# Altium PCB antenna_board.PcbDoc
Units mil, origin at the board's own origin, x right, y up, seen from the top; angles counter-clockwise.
Board outline 3895 x 2775 mil, 2 copper layers (Top Layer, Bottom Layer); 31 components, 17 nets, 105 pads, 14 vias.
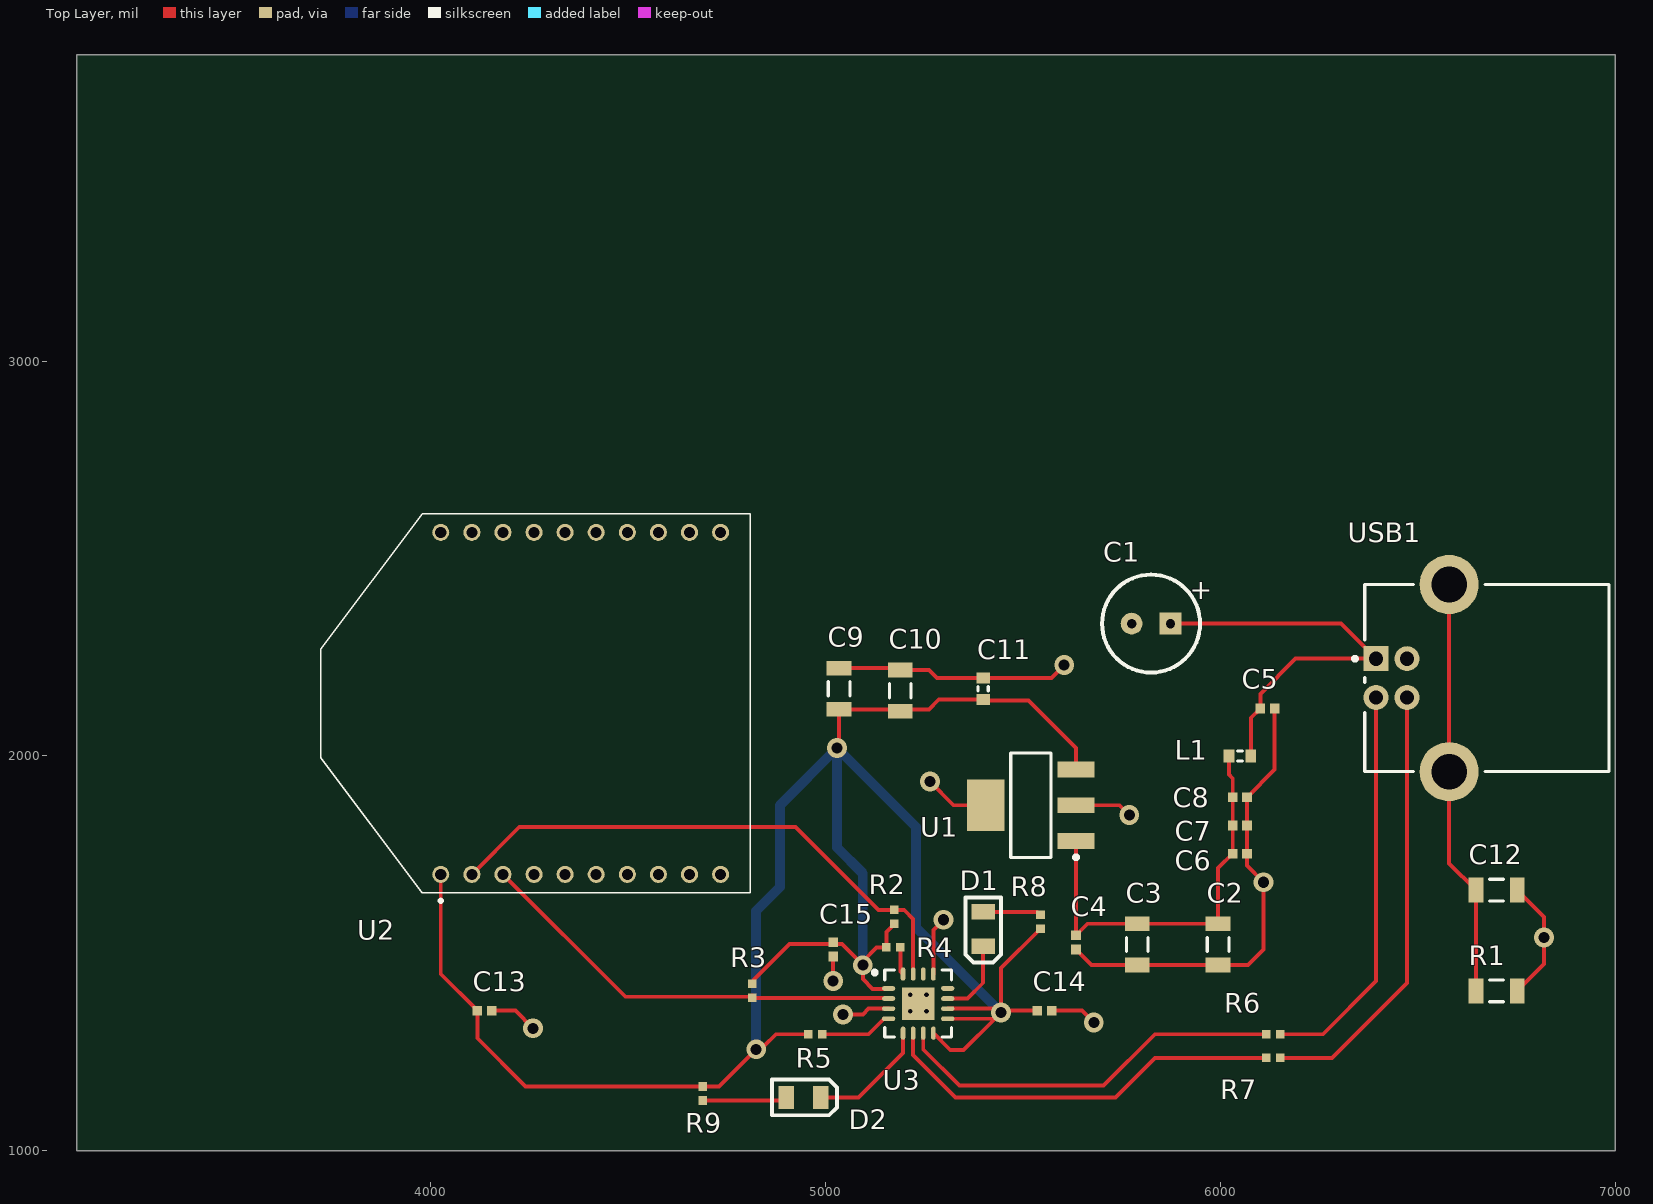
[diagram p0: Top Layer view]
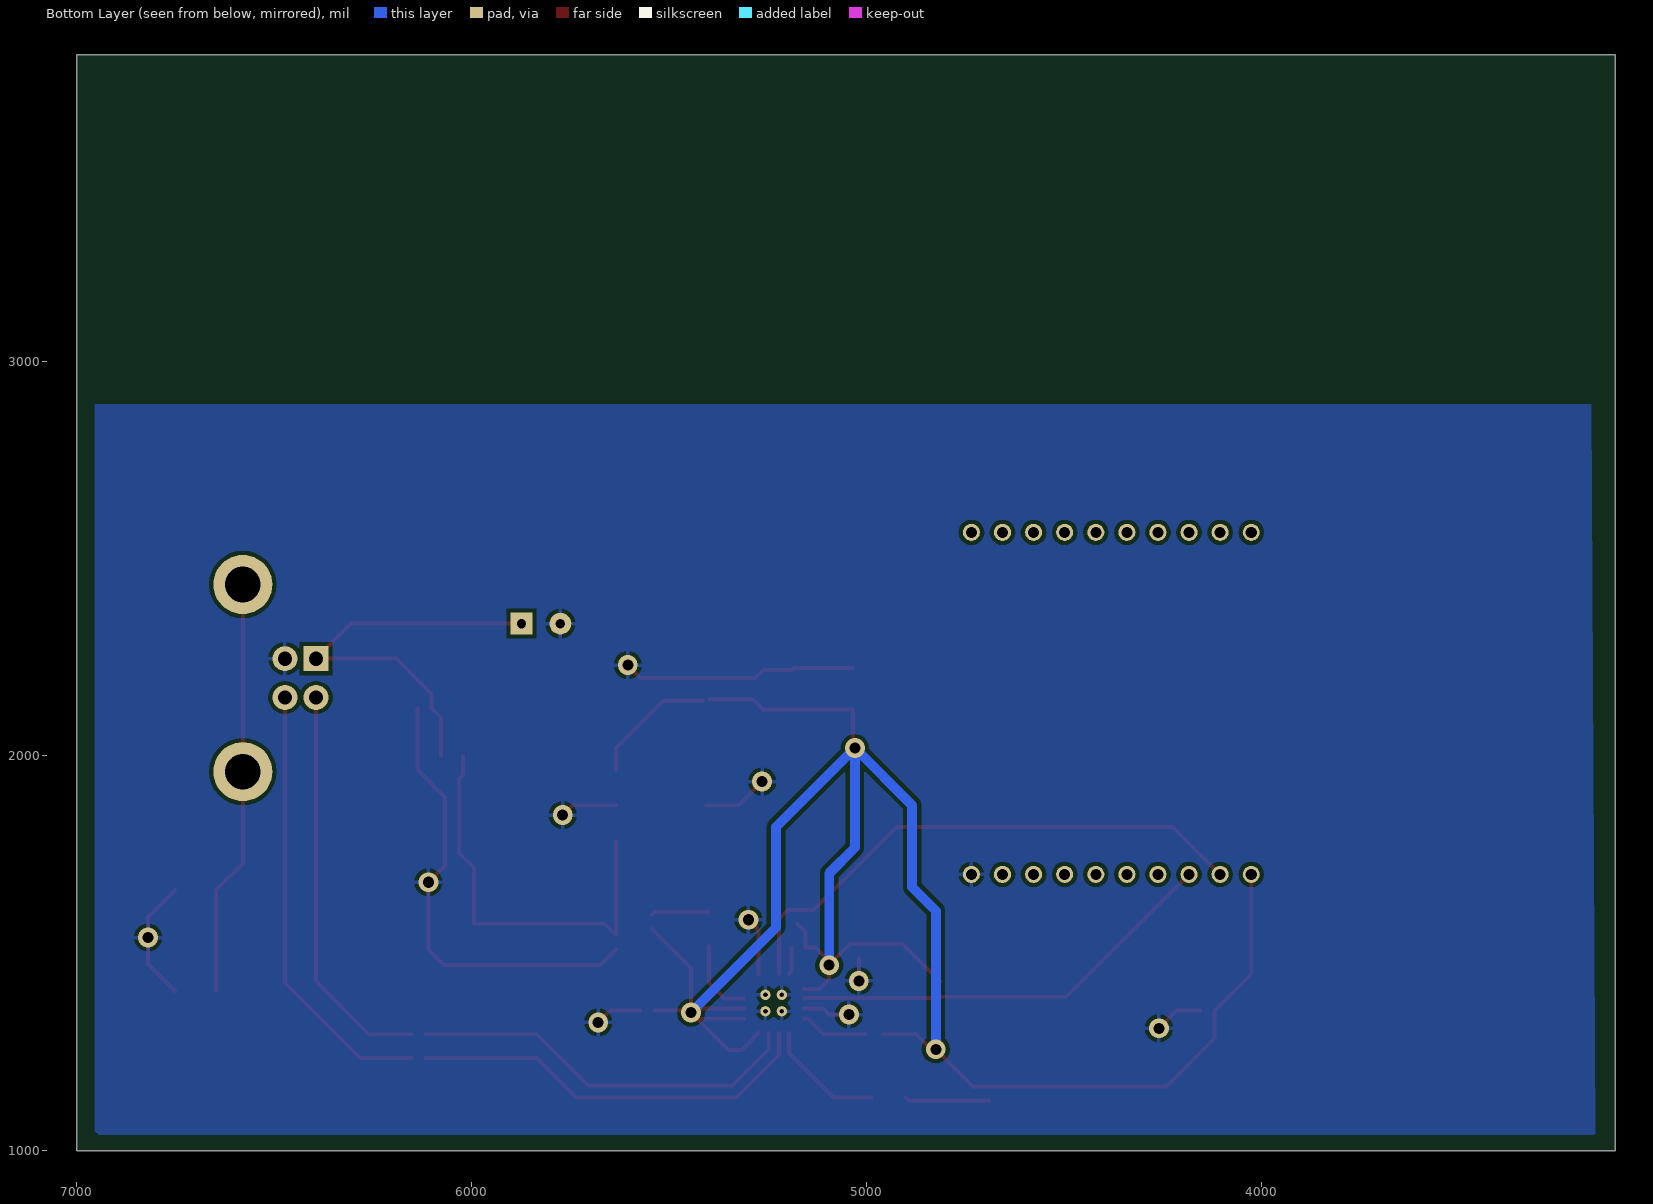
[diagram p1: Bottom Layer view, seen from below]
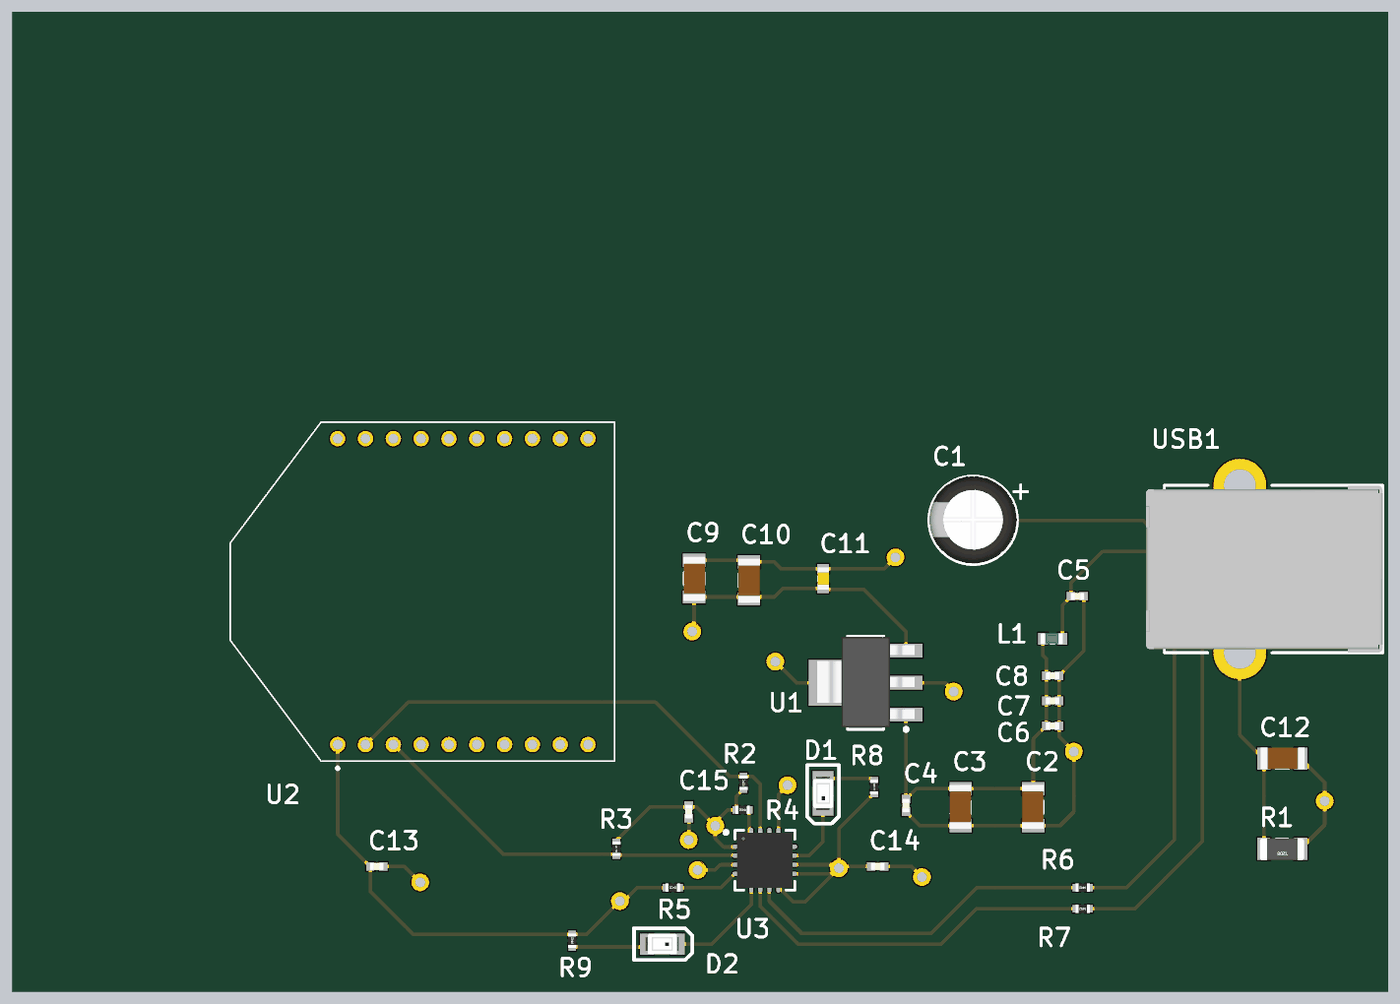
[diagram p2: 3D render of the assembled board from above, using the file's embedded part models]

## Layer stack, top to bottom
Top Solder: solder mask 0.4, Solder Resist, Dk 3.5
Top Layer: signal copper 1.4
Dielectric 1: dielectric 12.6, FR-4, Dk 4.8
Bottom Layer: signal copper 1.4
Bottom Solder: solder mask 0.4, Solder Resist, Dk 3.5

## Board outline
3105,1000 7000,1000 7000,3775 3105,3775

## Design rules (kind name [scope] priority, off if disabled: settings)
Clearance [All] p1: gap=10 ignorepadtopadclearanceinfootprint=FALSE
PolygonConnect [All] p1: connectstyle=Relief reliefconductorwidth=10 reliefentries=4 polygonreliefangle="90 Angle" airgapwidth=10
RoutingVias [All] p1: holewidth=28 width=50 viastyle="Through Hole" minholewidth=28 minwidth=50 maxholewidth=28 maxwidth=50
SolderMaskExpansion [All] p1: expansion=4
Width [All] p1: maxlimit=25 minlimit=10 preferedwidth=10 toplayer_maxwidth=10 minimp=50.000000 maximp=50.000000 favimp=50.000000
30 further rules are at their usual default settings.

## Components (designator, comment, footprint, x,y, rotation, side; value= is the part's Value field where it differs from the comment)
C1 "100uF" CapAlu6.3mmx12.5mm 5825,2335 r0 top
C2 "100uF" CAP_1206 5995,1522.72 r270 top
C3 "100uF" CAP_1206 5790,1522.72 r270 top
C4 "1uF" CAP_0402_M 5635,1527.72 r90 top
C5 "10nF" CAP_0402_M 6120,2120 r180 top
C6 "100nF" CAP_0402_M 6050,1752.56 r180 top
C7 "2.2uF" CAP_0402_M 6050,1823.78 r180 top
C8 "2.2uF" CAP_0402_M 6050,1895 r180 top
C9 "100uF" CAP_1206 5035,2170 r90 top
C10 "100uF" CAP_1206 5190,2165 r90 top
C11 "10uF" CAP_0603 5400,2170 r90 top
C12 "10nF" CAP_1206 6700,1660 r180 top
C13 "100nF" CAP_0402_M 4136.89,1355 r180 top
C14 "100nF" CAP_0402_M 5555,1355 r180 top
C15 "100nF" CAP_0402_M 5020,1510 r90 top
D1 "Led Red" "TOPLED 0805" 5400,1561.69 r270 top
D2 "Led Red" "TOPLED 0805" 4945,1135 r0 top
L1 "200R" IND_0603 6050,2000 r180 top
R1 "1M" RES_1206 6700,1405 r180 top
R2 "10k" RES_0402_M 5175,1592.28 r270 top
R3 "10k" RES_0402_M 4815,1405 r90 top
R4 "10k" RES_0402_M 5172.28,1515 r180 top
R5 "10k" RES_0402_M 4975,1295 r180 top
R6 "27" RES_0402_M 6135,1295 r180 top
R7 "27" RES_0402_M 6135,1235 r180 top
R8 "120" RES_0402_M 5545,1580 r270 top
R9 "120" RES_0402_M 4690,1145 r90 top
U1 "MCP1825S-3302E/DB" SOT230P700X180-4N 5520.83,1875 r180 top
U2 "XB3-24Z8ST" XB324Z8ST 4026.26,1700 r90 top
U3 "FT230XQ" QFN65P400X400X80_HS-17N 5235.32,1372.67 r0 top
USB1 "USB type-B jack" USB2.5-2H4E 6433.94,2197.01 r0 top

## Footprints (in the part's own frame and the unit in brackets; to place one, negate y for a bottom-side part, rotate by r counter-clockwise, add the part's x,y. Pads: shape width x height; smd on the part's side, far side on the other; paste and mask are expansions set on the pad)
CAP_0402_M [mm] "Chip Capacitor, 2-Leads, Body 1.00x0.50mm, IPC Medium Density"
  rect 0.62x0.62 smd: 1(-0.46,0) 2(0.46,0)
  body extent -0.5,-0.26 0.5,0.27, height 0.36
CAP_0603 [mm] "Chip Capacitor, 2-Leads, Body 1,6x0,8mm, IPC High Density"
  rect 0.7x0.85 smd: 1(-0.7,0) 2(0.7,0)
  silkscreen extent -0.15,-0.33 0.15,0.33, body extent -0.8,-0.42 0.8,0.38, height 0.7
CAP_1206 [mm] "Chip Capacitor, 2-Leads, Body 3,1x1,6mm, IPC High Density"
  rect 0.95x1.6 smd: 1(-1.325,0) 2(1.325,0)
  silkscreen extent -0.45,-0.7 0.45,0.7, body extent -1.63,-0.82 1.57,0.78, height 1.6
CapAlu6.3mmx12.5mm [mm] "Capacitor Aluminum 6.3mm OD"
  rect 1.4x1.4 hole 0.6: 1(1.25,0)
  round 1.4 hole 0.6: 2(-1.25,0)
  silkscreen extent -3.15,-3.15 3.15,3.15, body extent -3.15,-3.11 3.15,3.19, height 12
IND_0603 [mm]
  rect 0.7x0.85 smd: 1(-0.7,0) 2(0.7,0)
  silkscreen extent -0.15,-0.33 0.15,0.33, body extent -0.74,-0.4 0.86,0.4, height 0.95
QFN65P400X400X80_HS-17N [mm] "QFN, 16-Leads, Body 4.00x4.00mm, Pitch 0.65mm, Thermal Pad 2.08x2.08mm, IPC Medium Density"
  oval 0.85x0.3 smd: 1(-1.9,0.975) 2(-1.9,0.325) 3(-1.9,-0.325) 4(-1.9,-0.975) 9(1.9,-0.975) 10(1.9,-0.325) 11(1.9,0.325) 12(1.9,0.975)
  oval 0.3x0.85 smd: 5(-0.975,-1.9) 6(-0.325,-1.9) 7(0.325,-1.9) 8(0.975,-1.9) 13(0.975,1.9) 14(0.325,1.9) 15(-0.325,1.9) 16(-0.975,1.9)
  round 0.66 hole 0.305: 17(-0.516,-0.493) 17(-0.516,0.567) 17(0.538,-0.493) 17(0.538,0.567)
  rect 2.08x2.08 smd: 17(0,0)
  silkscreen extent -2.92,-2.15 2.15,2.15, body extent -2,-2 2,2, height 0.92
RES_0402_M [mm] "Chip Resistor, 2-Leads, Body 1.00x0.50mm, IPC Medium Density"
  rect 0.55x0.55 smd: 1(-0.45,0) 2(0.45,0)
  body extent -0.52,-0.3 0.52,0.3, height 0.34
RES_1206 [mm] "Chip Resistor 2-Leads, Body 3,1x1,6mm, IPC High Density"
  rect 0.95x1.6 smd: 1(-1.325,0) 2(1.325,0)
  silkscreen extent -0.45,-0.7 0.45,0.7, body extent -1.59,-0.76 1.61,0.84, height 1
SOT230P700X180-4N [mm] "SOT223, 4-Leads, Body 6,7x7,3mm (max), Pitch 2,30mm, IPC Medium Density"
  rect 2.4x1 smd: 1(-2.9,2.3) 2(-2.9,0) 3(-2.9,-2.3)
  rect 2.4x3.3 smd: 4(2.9,0)
  silkscreen extent -3.03,-3.35 1.3,3.47, body extent -3.5,-3.3 3.5,3.2, height 1.69
"TOPLED 0805" [mm]
  rect 1x1.5 smd: 1(-1.1,0) 2(1.1,0)
  silkscreen extent -2.03,-1.14 2.16,1.14, body extent -1.2,-0.74 1.2,0.76, height 1.45
USB2.5-2H4E [mm] "Connector; USB1.1, Type B, Thru-Hole; 4 Position; Right Angle"
  rect 1.6x1.6 hole 0.92: 1(-1,1.25)
  round 1.6 hole 0.92: 2(-1,-1.25) 3(1,-1.25) 4(1,1.25)
  round 3.8 hole 2.3: 5(3.71,6.02) 6(3.71,-6.02)
  silkscreen extent -2.47,-6.02 13.99,6.02, body extent -3.03,-6 13.97,6, height 10.9
XB324Z8ST [mm]
  round 1.1 hole 0.71: 1(0,0) 2(0,-2) 3(0,-4) 4(0,-6) 5(0,-8) 6(0,-10) 7(0,-12) 8(0,-14) 9(0,-16) 10(0,-18) 11(22,-18) 12(22,-16) 13(22,-14) 14(22,-12) 15(22,-10) 16(22,-8) 17(22,-6) 18(22,-4) 19(22,-2) 20(22,0)
  silkscreen extent -1.8,-19.91 23.19,7.72

## Part data
C1: library part 100uF_35v_6.3x12.5, "Capacitor 35v 100uF 6.3mm", Capacitance=100µF, ESR (Equivalent Series Resistance)=-, Lifetime @ Temp.="5000 Hrs @ 105°C", Manufacturer=Nichicon, Manufacturer Part Number=UHV1V101MED, Operating Temperature="-40°C ~ 105°C", Package / Case="Radial, Can", Ripple Current="220mA @ 120Hz", Supplier Part Number 1=493-13394-ND, Tolerance=±20%, Voltage Rating=35V, Applications="General Purpose", Category=Capacitors, ComponentLink1Description=http://nichicon-us.com/english/products/pdfs/e-uhv.pdf, ComponentLink1URL=http://nichicon-us.com/english/products/pdfs/e-uhv.pdf, Height - Seated (Max)="0.492\" (12.50mm)", Impedance="100 mOhm", Lead Spacing="0.098\" (2.50mm)", Mounting Type="Through Hole", Packaging=Bulk, Polarization=Polar, Pricing 1="1=0.46, 10=0.32, 25=0.262, 50=0.224, 100=0.1919, 250=0.15992, 500=0.14394, 1000=0.12155, 2500=0.11515 (CAD)", RoHS="RoHS Compliant", Size / Dimension="0.248\" Dia (6.30mm)", Stock 1=5561, Supplier 1=Digi-Key, Surface Mount Land Size=-
C2 C3 C9 C10: library part 100uF_6.3v_1206_X5R, "CAP CER 100UF 6.3V X5R 1206", Capacitance=100µF, Manufacturer="Murata Electronics North America", Manufacturer Part Number=GRM31CR60J107ME39L, Operating Temperature="-55°C ~ 85°C", Package / Case="1206 (3216 Metric)", Ratings=-, Supplier Part Number 1=490-4539-1-ND, Temperature Coefficient=X5R, Tolerance=±20%, Voltage - Rated=6.3V, Applications="General Purpose", Category=Capacitors, ComponentLink1Description=http://www.murata.com/~/media/webrenewal/support/library/catalog/products/capacitor/mlcc/c02e.pdf, ComponentLink1URL=http://www.murata.com/~/media/webrenewal/support/library/catalog/products/capacitor/mlcc/c02e.pdf, Features=-, Height - Seated (Max)=-, Lead Spacing=-, Lead Style=-, Mounting Type="Surface Mount, MLCC", Packaging="Cut Tape (CT)", Pricing 1="1=1.23, 10=1.048, 50=0.771, 100=0.6128, 250=0.51396, 500=0.46456, 1000=0.42502 (CAD)", RoHS="RoHS Compliant", Size / Dimension="0.126\" L x 0.063\" W (3.20mm x 1.60mm)", Stock 1=450179, Supplier 1=Digi-Key, Thickness (Max)="0.071\" (1.80mm)"
C4: library part 1uF_25V_0402, "CAP CER 1UF 25V 10% X5R 0402", Capacitance=1µF, Manufacturer="TDK Corporation", Manufacturer Part Number=C1005X5R1E105K050BC, Operating Temperature="-55°C ~ 85°C", Package / Case="0402 (1005 Metric)", Ratings=-, Supplier Part Number 1=445-9066-1-ND, Temperature Coefficient=X5R, Tolerance=±10%, Voltage - Rated=25V, Applications="General Purpose", Category=Capacitors, ComponentLink1Description=http://product.tdk.com/en/catalog/datasheets/mlcc_commercial_general_en.pdf, ComponentLink1URL=http://product.tdk.com/en/catalog/datasheets/mlcc_commercial_general_en.pdf, Features=-, Height - Seated (Max)=-, Lead Spacing=-, Lead Style=-, Mounting Type="Surface Mount, MLCC", Packaging="Cut Tape (CT)", Pricing 1="1=0.27, 10=0.185, 100=0.0878, 250=0.074, 500=0.06196, 1000=0.05087, 5000=0.04301 (CAD)", RoHS="RoHS Compliant", Size / Dimension="0.039\" L x 0.020\" W (1.00mm x 0.50mm)", Stock 1=310467, Supplier 1=Digi-Key, Thickness (Max)="0.022\" (0.55mm)"
C5: library part 10nF_50V_0402, "CAP CER 10000PF 50V 10% X7R 0402", Capacitance=10000pF, Manufacturer=Kemet, Manufacturer Part Number=C0402C103K5RACTU, Operating Temperature="-55°C ~ 125°C", Package / Case="0402 (1005 Metric)", Ratings=-, Supplier Part Number 1=399-3066-1-ND, Temperature Coefficient=X7R, Tolerance=±10%, Voltage - Rated=50V, Applications="General Purpose", Category=Capacitors, ComponentLink1Description=http://www.kemet.com/docfinder?Partnumber=C0402C103K5RACTU, ComponentLink1URL=http://www.kemet.com/docfinder?Partnumber=C0402C103K5RACTU, Features=-, Height - Seated (Max)=-, Lead Spacing=-, Lead Style=-, Mounting Type="Surface Mount, MLCC", Packaging="Cut Tape (CT)", Pricing 1="1=0.14, 10=0.037, 25=0.026, 50=0.0198, 100=0.0166, 250=0.01364, 1000=0.00893, 2500=0.00804, 5000=0.00744 (CAD)", RoHS="RoHS Compliant", Size / Dimension="0.039\" L x 0.020\" W (1.00mm x 0.50mm)", Stock 1=3556921, Supplier 1=Digi-Key, Thickness (Max)="0.022\" (0.55mm)"
C6 C13 C14 C15: library part 100nF_50V_0402, "CAP CER 100NF 50V 20% X5R 0402", Capacitance=0.1µF, Manufacturer="TDK Corporation", Manufacturer Part Number=C1005X5R1H104M050BB, Operating Temperature="-55°C ~ 85°C", Package / Case="0402 (1005 Metric)", Ratings=-, Supplier Part Number 1=445-5943-1-ND, Temperature Coefficient=X5R, Tolerance=±20%, Voltage - Rated=50V, Applications="General Purpose", Category=Capacitors, ComponentLink1Description=http://product.tdk.com/en/catalog/datasheets/mlcc_commercial_general_en.pdf, ComponentLink1URL=http://product.tdk.com/en/catalog/datasheets/mlcc_commercial_general_en.pdf, Features=-, Height - Seated (Max)=-, Lead Spacing=-, Lead Style=-, Mounting Type="Surface Mount, MLCC", Packaging="Cut Tape (CT)", Pricing 1="1=0.18, 10=0.122, 100=0.0579, 250=0.04872, 500=0.0408, 1000=0.03348, 5000=0.02831 (CAD)", RoHS="RoHS Compliant", Size / Dimension="0.039\" L x 0.020\" W (1.00mm x 0.50mm)", Stock 1=218263, Supplier 1=Digi-Key, Thickness (Max)="0.022\" (0.55mm)"
C7 C8: library part 2.2uF_10V_0402, "CAP CER 2.2UF 10V 20% X5R 0402", Capacitance=2.2µF, Manufacturer="Taiyo Yuden", Manufacturer Part Number=LMK105BJ225MV-F, Operating Temperature="-55°C ~ 85°C", Package / Case="0402 (1005 Metric)", Ratings=-, Supplier Part Number 1=587-3153-1-ND, Temperature Coefficient=X5R, Tolerance=±20%, Voltage - Rated=10V, Applications="General Purpose", Category=Capacitors, ComponentLink1Description=http://www.yuden.co.jp/ut/product/category/capacitor/LMK105BJ225MV-F.pdf, ComponentLink1URL=http://www.yuden.co.jp/ut/product/category/capacitor/LMK105BJ225MV-F.pdf, Features=-, Height - Seated (Max)=-, Lead Spacing=-, Lead Style=-, Mounting Type="Surface Mount, MLCC", Packaging="Cut Tape (CT)", Pricing 1="1=0.26, 10=0.173, 50=0.105, 100=0.0881, 250=0.07132, 500=0.0629, 1000=0.05348, 2500=0.04928, 5000=0.04509 (CAD)", RoHS="RoHS Compliant", Size / Dimension="0.039\" L x 0.020\" W (1.00mm x 0.50mm)", Stock 1=258065, Supplier 1=Digi-Key, Thickness (Max)="0.022\" (0.55mm)"
C11: library part 10uF_10V_0603, "CAP CER 10UF 10V 20% X5R 0603", Capacitance=10µF, Manufacturer="Taiyo Yuden", Manufacturer Part Number=LMK107BBJ106MAHT, Operating Temperature="-55°C ~ 85°C", Package / Case="0603 (1608 Metric)", Ratings=AEC-Q200, Supplier Part Number 1=587-3412-1-ND, Temperature Coefficient=X5R, Tolerance=±20%, Voltage - Rated=10V, Applications=Automotive, Category=Capacitors, ComponentLink1Description=http://www.yuden.co.jp/productdata/catalog/en/mlcc01_hq_e.pdf, ComponentLink1URL=http://www.yuden.co.jp/productdata/catalog/en/mlcc01_hq_e.pdf, Features=-, Height - Seated (Max)=-, Lead Spacing=-, Lead Style=-, Mounting Type="Surface Mount, MLCC", Packaging="Cut Tape (CT)", Pricing 1="1=0.5, 10=0.437, 50=0.266, 100=0.2189, 250=0.17516, 500=0.15952, 1000=0.14107 (CAD)", RoHS="RoHS Compliant", Size / Dimension="0.063\" L x 0.031\" W (1.60mm x 0.80mm)", Stock 1=90195, Supplier 1=Digi-Key, Thickness (Max)="0.035\" (0.90mm)"
C12: library part 10nF_500V_1206, "CAP CER 10000PF 500V X7R 1206", Capacitance=10000pF, Manufacturer="Samsung Electro-Mechanics America, Inc", Manufacturer Part Number=CL31B103KGFNNNE, Operating Temperature="-55°C ~ 125°C", Package / Case="1206 (3216 Metric)", Ratings=-, Supplier Part Number 1=1276-3076-1-ND, Temperature Coefficient=X7R, Tolerance=±10%, Voltage - Rated=500V, Applications="General Purpose", Category=Capacitors, ComponentLink1Description=http://www.samsungsem.com/kr/front/downloadcms.do?path=/kr/support/product-search/mlcc/__icsFiles/afieldfile/2014/11/05&fileName=S_CL31B103KGFNNNE.pdf, ComponentLink1URL=http://www.samsungsem.com/kr/front/downloadcms.do?path=/kr/support/product-search/mlcc/__icsFiles/afieldfile/2014/11/05&fileName=S_CL31B103KGFNNNE.pdf, Features=-, Height - Seated (Max)=-, Lead Spacing=-, Lead Style=-, Mounting Type="Surface Mount, MLCC", Packaging="Cut Tape (CT)", Pricing 1="1=0.34, 10=0.28, 25=0.192, 100=0.1398, 500=0.09266, 1000=0.08216 (CAD)", RoHS="RoHS Compliant", Size / Dimension="0.126\" L x 0.063\" W (3.20mm x 1.60mm)", Stock 1=9075, Supplier 1=Digi-Key, Thickness (Max)="0.055\" (1.40mm)"
D1 D2: library part "TOPLED 0803", "LED TOPLED 630NM SUP RED CLR SMD", Color=Red, Current - Test=2mA, Luminous Flux @ Current - Test="25 mlm", Manufacturer="OSRAM Opto Semiconductors Inc", Manufacturer Part Number="LS M67K-H2L1-1-Z", Millicandela Rating=8.78mcd, Package / Case="2-SMD, J-Lead", Supplier Part Number 1=475-2510-1-ND, Voltage - Forward (Vf) (Typ)=1.8V, Category=Optoelectronics, ComponentLink1Description=http://media.digikey.com/pdf/Data%20Sheets/Osram%20PDFs/LS,LO,LY_M67K.pdf, ComponentLink1URL=http://media.digikey.com/pdf/Data%20Sheets/Osram%20PDFs/LS,LO,LY_M67K.pdf, Height=1.30mm, Lens Style/Size="Rectangle with Flat Top, 1.5mm x 1mm", Lens Type=Clear, Mounting Type="Surface Mount", Packaging="Cut Tape (CT)", Pricing 1="1=0.19, 10=0.162, 100=0.1295, 250=0.11328, 500=0.10354 (CAD)", RoHS="RoHS Compliant", Size / Dimension="2.20mm L x 1.40mm W", Stock 1=23262, Supplier 1=Digi-Key, Viewing Angle=120°, Wavelength - Dominant=630nm, Wavelength - Peak=643nm
L1: library part "Ferrite_200 ohms_2A", "FILTER CHIP 220 OHM 2A 0603", Current Rating=2A, DC Resistance (DCR)="50 mOhm Max", Impedance @ Frequency="220 Ohm @ 100MHz", Manufacturer="Murata Electronics North America", Manufacturer Part Number=BLM18EG221SN1D, Package / Case="0603 (1608 Metric)", Supplier Part Number 1=490-3992-1-ND, Category=Filters, ComponentLink1Description=http://search.murata.co.jp/Ceramy/image/img/PDF/ENG/L0110S0101BLM18E.pdf, ComponentLink1URL=http://search.murata.co.jp/Ceramy/image/img/PDF/ENG/L0110S0101BLM18E.pdf, Filter Type="Differential Mode - Single", Height (Max)="0.037\" (0.95mm)", Mounting Type="Surface Mount", Packaging="Cut Tape (CT)", Pricing 1="1=0.33, 10=0.254, 50=0.1814, 100=0.1632, 250=0.13784, 500=0.12332, 1000=0.10519 (CAD)", RoHS="RoHS Compliant", Size / Dimension="0.063\" L x 0.031\" W (1.60mm x 0.80mm)", Stock 1=382631, Supplier 1=Digi-Key
R1: library part 1M_5%_1206, "RES SMD 1M OHM 5% 1/4W 1206", Manufacturer="Panasonic Electronic Components", Manufacturer Part Number=ERJ-8GEYJ105V, Operating Temperature="-55°C ~ 155°C", Package / Case="1206 (3216 Metric)", Power (Watts)="0.25W, 1/4W", Supplier Device Package=1206, Supplier Part Number 1=P1.0MECT-ND, Temperature Coefficient=±200ppm/°C, Tolerance=±5%, Category=Resistors, ComponentLink1Description=http://industrial.panasonic.com/www-cgi/jvcr13pz.cgi?E+PZ+3+AOA0001+ERJ8GEYJ105V+7+WW, ComponentLink1URL=http://industrial.panasonic.com/www-cgi/jvcr13pz.cgi?E+PZ+3+AOA0001+ERJ8GEYJ105V+7+WW, Composition="Thick Film", Features="Automotive AEC-Q200", Height="0.028\" (0.70mm)", Number of Terminations=2, Packaging="Cut Tape (CT)", Pricing 1="1=0.14, 50=0.038, 100=0.029, 250=0.02152, 500=0.01588, 1000=0.01059, 2500=0.00894 (CAD)", Resistance (Ohms)=1M, RoHS="RoHS Compliant", Size / Dimension="0.126\" L x 0.063\" W (3.20mm x 1.60mm)", Stock 1=165352, Supplier 1=Digi-Key
R2 R3 R4 R5: library part 10k_1%_0402, "RES SMD 10K OHM 1% 1/10W 0402", Manufacturer="Panasonic Electronic Components", Manufacturer Part Number=ERJ-2RKF1002X, Operating Temperature="-55°C ~ 155°C", Package / Case="0402 (1005 Metric)", Power (Watts)="0.1W, 1/10W", Supplier Device Package=0402, Supplier Part Number 1=P10.0KLCT-ND, Temperature Coefficient=±100ppm/°C, Tolerance=±1%, Category=Resistors, ComponentLink1Description=http://industrial.panasonic.com/www-cgi/jvcr13pz.cgi?E+PZ+3+AOA0002+ERJ2RKF1002X+7+WW, ComponentLink1URL=http://industrial.panasonic.com/www-cgi/jvcr13pz.cgi?E+PZ+3+AOA0002+ERJ2RKF1002X+7+WW, Composition="Thick Film", Features="Automotive AEC-Q200", Height="0.016\" (0.40mm)", Number of Terminations=2, Packaging="Cut Tape (CT)", Pricing 1="1=0.14, 50=0.0282, 100=0.0215, 250=0.01592, 500=0.01176, 1000=0.00784, 5000=0.00551 (CAD)", Resistance (Ohms)=10k, RoHS="RoHS Compliant", Size / Dimension="0.039\" L x 0.020\" W (1.00mm x 0.50mm)", Stock 1=5818216, Supplier 1=Digi-Key
R6 R7: library part 27_1%_0402, "RES SMD 27 OHM 1% 1/10W 0402", Manufacturer="Panasonic Electronic Components", Manufacturer Part Number=ERJ-2RKF27R0X, Operating Temperature="-55°C ~ 155°C", Package / Case="0402 (1005 Metric)", Power (Watts)="0.1W, 1/10W", Supplier Device Package=0402, Supplier Part Number 1=P27.0LCT-ND, Temperature Coefficient=±100ppm/°C, Tolerance=±1%, Category=Resistors, ComponentLink1Description=http://industrial.panasonic.com/www-cgi/jvcr13pz.cgi?E+PZ+3+AOA0002+ERJ2RKF27R0X+7+WW, ComponentLink1URL=http://industrial.panasonic.com/www-cgi/jvcr13pz.cgi?E+PZ+3+AOA0002+ERJ2RKF27R0X+7+WW, Composition="Thick Film", Features="Automotive AEC-Q200", Height="0.016\" (0.40mm)", Number of Terminations=2, Packaging="Cut Tape (CT)", Pricing 1="1=0.16, 50=0.0234, 100=0.0171, 250=0.01308, 500=0.01048, 1000=0.00771, 5000=0.00553 (CAD)", Resistance (Ohms)=27, RoHS="RoHS Compliant", Size / Dimension="0.039\" L x 0.020\" W (1.00mm x 0.50mm)", Stock 1=490131, Supplier 1=Digi-Key
R8 R9: library part 120_1%_0402, "RES SMD 120 OHM 1% 1/10W 0402", Manufacturer="Panasonic Electronic Components", Manufacturer Part Number=ERJ-2RKF1200X, Operating Temperature="-55°C ~ 155°C", Package / Case="0402 (1005 Metric)", Power (Watts)="0.1W, 1/10W", Supplier Device Package=0402, Supplier Part Number 1=P120LCT-ND, Temperature Coefficient=±100ppm/°C, Tolerance=±1%, Category=Resistors, ComponentLink1Description=http://industrial.panasonic.com/www-cgi/jvcr13pz.cgi?E+PZ+3+AOA0002+ERJ2RKF1200X+7+WW, ComponentLink1URL=http://industrial.panasonic.com/www-cgi/jvcr13pz.cgi?E+PZ+3+AOA0002+ERJ2RKF1200X+7+WW, Composition="Thick Film", Features="Automotive AEC-Q200", Height="0.016\" (0.40mm)", Number of Terminations=2, Packaging="Cut Tape (CT)", Pricing 1="1=0.14, 50=0.0282, 100=0.0215, 250=0.01592, 500=0.01176, 1000=0.00784, 5000=0.00551 (CAD)", Resistance (Ohms)=120, RoHS="RoHS Compliant", Size / Dimension="0.039\" L x 0.020\" W (1.00mm x 0.50mm)", Stock 1=184236, Supplier 1=Digi-Key
U1: "500 mA, Low Voltage, Low Quiescent Current LDO Regulator", Current - Limit (Min)=-, Current - Output=500mA, Manufacturer="Microchip Technology", Operating Temperature="-40°C ~ 125°C", Package / Case="TO-261-4, TO-261AA", Supplier Device Package=SOT-223-3, Supplier Part Number 1=MCP1825S-3302E/DB-ND, Voltage - Dropout (Typical)="0.21V @ 500mA", Voltage - Input="Up to 6V", Voltage - Output=3.3V, Category="Integrated Circuits (ICs)", ComponentLink1Description=http://www.microchip.com/mymicrochip/filehandler.aspx?ddocname=en531698, ComponentLink1URL=http://www.microchip.com/mymicrochip/filehandler.aspx?ddocname=en531698, Manufacturer Part Number=MCP1825S-3302E/DB, Mounting Type="Surface Mount", Number of Regulators=1, Packaging=Tube, Pricing 1="1=0.61, 10=0.51, 25=0.43, 100=0.39 (USD)", Regulator Topology="Positive Fixed", RoHS="RoHS Compliant", Stock 1=5172, Supplier 1=Digi-Key
U2: "Integrated Circuit", Manufacturer_Name="Digi International", Mouser2 Part Number=888-XB3-24Z8ST, Datasheet Link=https://componentsearchengine.com//XB3-24Z8ST.pdf, Height=5mm, Manufacturer_Part_Number=XB3-24Z8ST, Mouser2 Price/Stock=https://www.mouser.com/Search/Refine.aspx?Keyword=888-XB3-24Z8ST
U3: library part FT230XQ-R, "IC USB SERIAL BASIC UART 16QFN", Current - Supply=8mA, Manufacturer="FTDI, Future Technology Devices International Ltd", Operating Temperature="-40°C ~ 85°C", Package / Case="16-WQFN Exposed Pad", Supplier Device Package="16-QFN (4x4)", Supplier Part Number 1=768-1130-1-ND, Voltage - Supply="3.3 V ~ 5 V", Category="Integrated Circuits (ICs)", ComponentLink1Description=http://www.ftdichip.com/Support/Documents/DataSheets/ICs/DS_FT230X.pdf, ComponentLink1URL=http://www.ftdichip.com/Support/Documents/DataSheets/ICs/DS_FT230X.pdf, Function="Bridge, USB to UART", Interface=UART, Manufacturer Part Number=FT230XQ-R, Packaging="Cut Tape (CT)", Pricing 1="1=2.64, 25=2.5508, 100=2.4601, 250=2.21412, 500=1.994, 1000=1.89042, 2500=1.86128 (CAD)", Protocol=USB, RoHS="RoHS Compliant", Standards="USB 2.0", Stock 1=7567, Supplier 1=Digi-Key
USB1: library part "MOLEX 0670688010", Supplier Part Number 1=WM4064-ND, Supplier 1=Digi-Key

## Via types
v1: diameter 50, hole 28, Top Layer to Bottom Layer, 14 vias

## Nets (pads, with @x,y where several pads share a name; then routed paths per layer and width w, separated by ;. In a path a pad name is that pad's centre, name@x,y a point inside that pad or via, vN(x,y) a via of type N, cw(c..) or ccw(c..) an arc to the next point about the centre after c; other vN are vias at no path point)
+3.3V: C9.1 C10.1 C11.1 C13.2 C14.2 C15.2 R2.2 R3.2 R4.2 R5.2 R8.2 R9.2 U1.3 U2.1 U3.1 U3.8 U3.9 U3.10 | length 5878.7
  Top Layer w10: U2.1 4026.26,1447.52 C13.2 4118.78,1285 4241.06,1162.72 R9.2 4730.83,1162.72 v1(4825,1256.89) ; R3.2@4815,1428.77 4909.34,1523.11 5020,1523.11 5041.89,1523.11 v1(5095,1470) ; v1@4845,1265 4875,1295 R5.2 ; v1(5030,2020) 5035,2025 C9.1 5262.83,2117.83 5287.44,2142.44 C11.1 ; U3.1 5159.46,1410 5120,1410 5095,1435 v1(5095,1470) ; R2.2 5154.57,1554.13 R4.2 5130,1515 5095,1480 v1(5095,1470) ; U3.8 5316.57,1255 5350,1255 v1@5429.28,1334.28 ; U3.9 v1@5429.28,1334.28 ; U3.10 5435.13,1359.87 v1(5445,1350) ; C11.1@5415,2140 5515,2140 5635,2020 U1.3 ; C14.2 5450,1355 v1(5445,1350) ; R8.2 5445,1462.28 v1(5445,1350) ; v1@5429.28,1334.28 v1(5445,1350)
  Bottom Layer w25: v1(4825,1256.89) 4825,1607.65 4885,1667.65 4885,1875 v1(5030,2020) ; v1(5095,1470) 5095,1702.65 5030,1767.65 v1(5030,2020) ; v1(5445,1350) 5229.7,1565.3 5229.7,1820.3 v1(5030,2020)
+5V: C2.1 C3.1 C4.2 C6.2 C7.2 C8.2 L1.2 U1.1 | length 1055
  Top Layer w10: U1.1 C4.2 5664.06,1574.88 C3.1 C2.1 5995,1715.67 C6.2 C7.2 C8.2 6031.89,1943.11 6022.44,1952.56 L1.2
DM: R6.1 USB1.2 | length 1015.8
  Top Layer w10: R6.1 6260,1295 6394.57,1429.57 USB1.2
DP: R7.1 USB1.3 | length 1122.1
  Top Layer w10: R7.1 6283.31,1235 6473.31,1425 USB1.3
GND: C1.2 C2.2 C3.2 C4.1 C5.1 C6.1 C7.1 C8.1 C9.2 C10.2 C11.2 C12.1 C13.1 C14.1 C15.1 R1.1 U1.2 U1.4 U2.10 U3.3 U3.13 U3.17 USB1.4 | length 2946.2
  Top Layer w10: C13.1 4215,1355 v1(4260,1310) ; v1(5020,1430) C15.1@5020,1486.89 ; C9.2 5185,2222.17 C10.2 5262.83,2217.17 5282.44,2197.56 C11.2 5572.56,2197.56 v1(5605,2230) ; v1(5045,1345) 5095,1345 5109.87,1359.87 U3.3 ; v1(5265,1935) 5325,1875 U1.4 ; U3.13 5273.71,1559.13 v1(5299.58,1585) ; C14.1 5650,1355 v1(5680,1325) ; C4.1 5674.06,1470.55 C3.2 C2.2 6070.94,1470.55 6110,1509.61 v1(6110,1680) 6068.11,1721.89 C6.1 C7.1 C8.1@6068.11,1890.67 ; U1.2 5745,1875 v1(5770,1850) ; C8.1 6138.11,1965 C5.1 ; R1.1 6820,1472.83 v1(6820,1540) 6820,1592.17 C12.1
NetD1_1: D1.1 R8.1 | length 148
  Top Layer w10: D1.1 5537.72,1605 R8.1
NetD2_1: D2.1 R9.1 | length 214.9
  Top Layer w10: R9.1 4893.98,1127.28 D2.1
NetR4_1: R4.1 U3.16 | length 70.4
  Top Layer w10: R4.1 5190,1454.41 U3.16
NetR5_1: R5.1 U3.4 | length 174.1
  Top Layer w10: R5.1@5002.72,1295 5110,1295 5149.28,1334.28 U3.4
NetR6_2: R6.2 U3.7 | length 1002.1
  Top Layer w10: U3.7 5248.11,1256.89 5340,1165 5705,1165 5835,1295 R6.2
NetR7_2: R7.2 U3.6 | length 1036.1
  Top Layer w10: U3.6 5222.52,1242.48 5330,1135 5735,1135 5835,1235 R7.2
SHIELD: C12.2 R1.2 USB1.5 USB1.6 | length 1057.1
  Top Layer w10: USB1.5 USB1.6 6580,1727.83 C12.2 R1.2
"USB RX LED": D2.2 U3.5 | length 305.3
  Top Layer w10: D2.2 5083.87,1135 5196.93,1248.07 U3.5
"USB TX LED": D1.2 U3.11 | length 199.4
  Top Layer w10: U3.11 5360,1385.46 5400,1425.46 D1.2
USB_RX: R2.1 U2.2 U3.15 | length 1403.5
  Top Layer w10: U2.2 4225,1820 4925,1820 5135,1610 R2.1 5200,1610 5222.52,1587.48 U3.15
USB_TX: R3.1 U2.3 U3.2 | length 1111.8
  Top Layer w10: U2.3 4493.74,1390 R3.1@4818.34,1390 ; R3.1@4815,1393.34 R3.1@4818.34,1390 ; U3.2 5158.98,1387 4821.34,1387 R3.1@4818.34,1390
VBUS: C1.1 C5.2 L1.1 USB1.1 | length 1073.8
  Top Layer w10: C1.1@5854.21,2335 C1.1 6305.79,2335 USB1.1 6191.22,2246.22 6101.89,2156.89 C5.2 6077.56,2095.67 L1.1
pads on no net: U2.4 U2.5 U2.6 U2.7 U2.8 U2.9 U2.11 U2.12 U2.13 U2.14 U2.15 U2.16 U2.17 U2.18 U2.19 U2.20 U3.12 U3.14

## Polygon pours and split planes (outlines as drawn)
GND on Bottom Layer "Bottom Layer-GND" (solid, pour order 2): 3165,2890 6955,2890 6955,1050 6945,1040 3155,1040

## Silkscreen, mask and mechanical layers (free items; w line width, h text height)
Mechanical 1:
  lines w10: 3110,1005 3110,3765 4911.25,3765 5193.75,3765 6995,3765 6995,1005 3110,1005

## Text inside footprints (layer, text, board x,y; h text height)
C1: Top Overlay "+" at 5923.46,2396.54 h50